# Allegro board EX1.brd
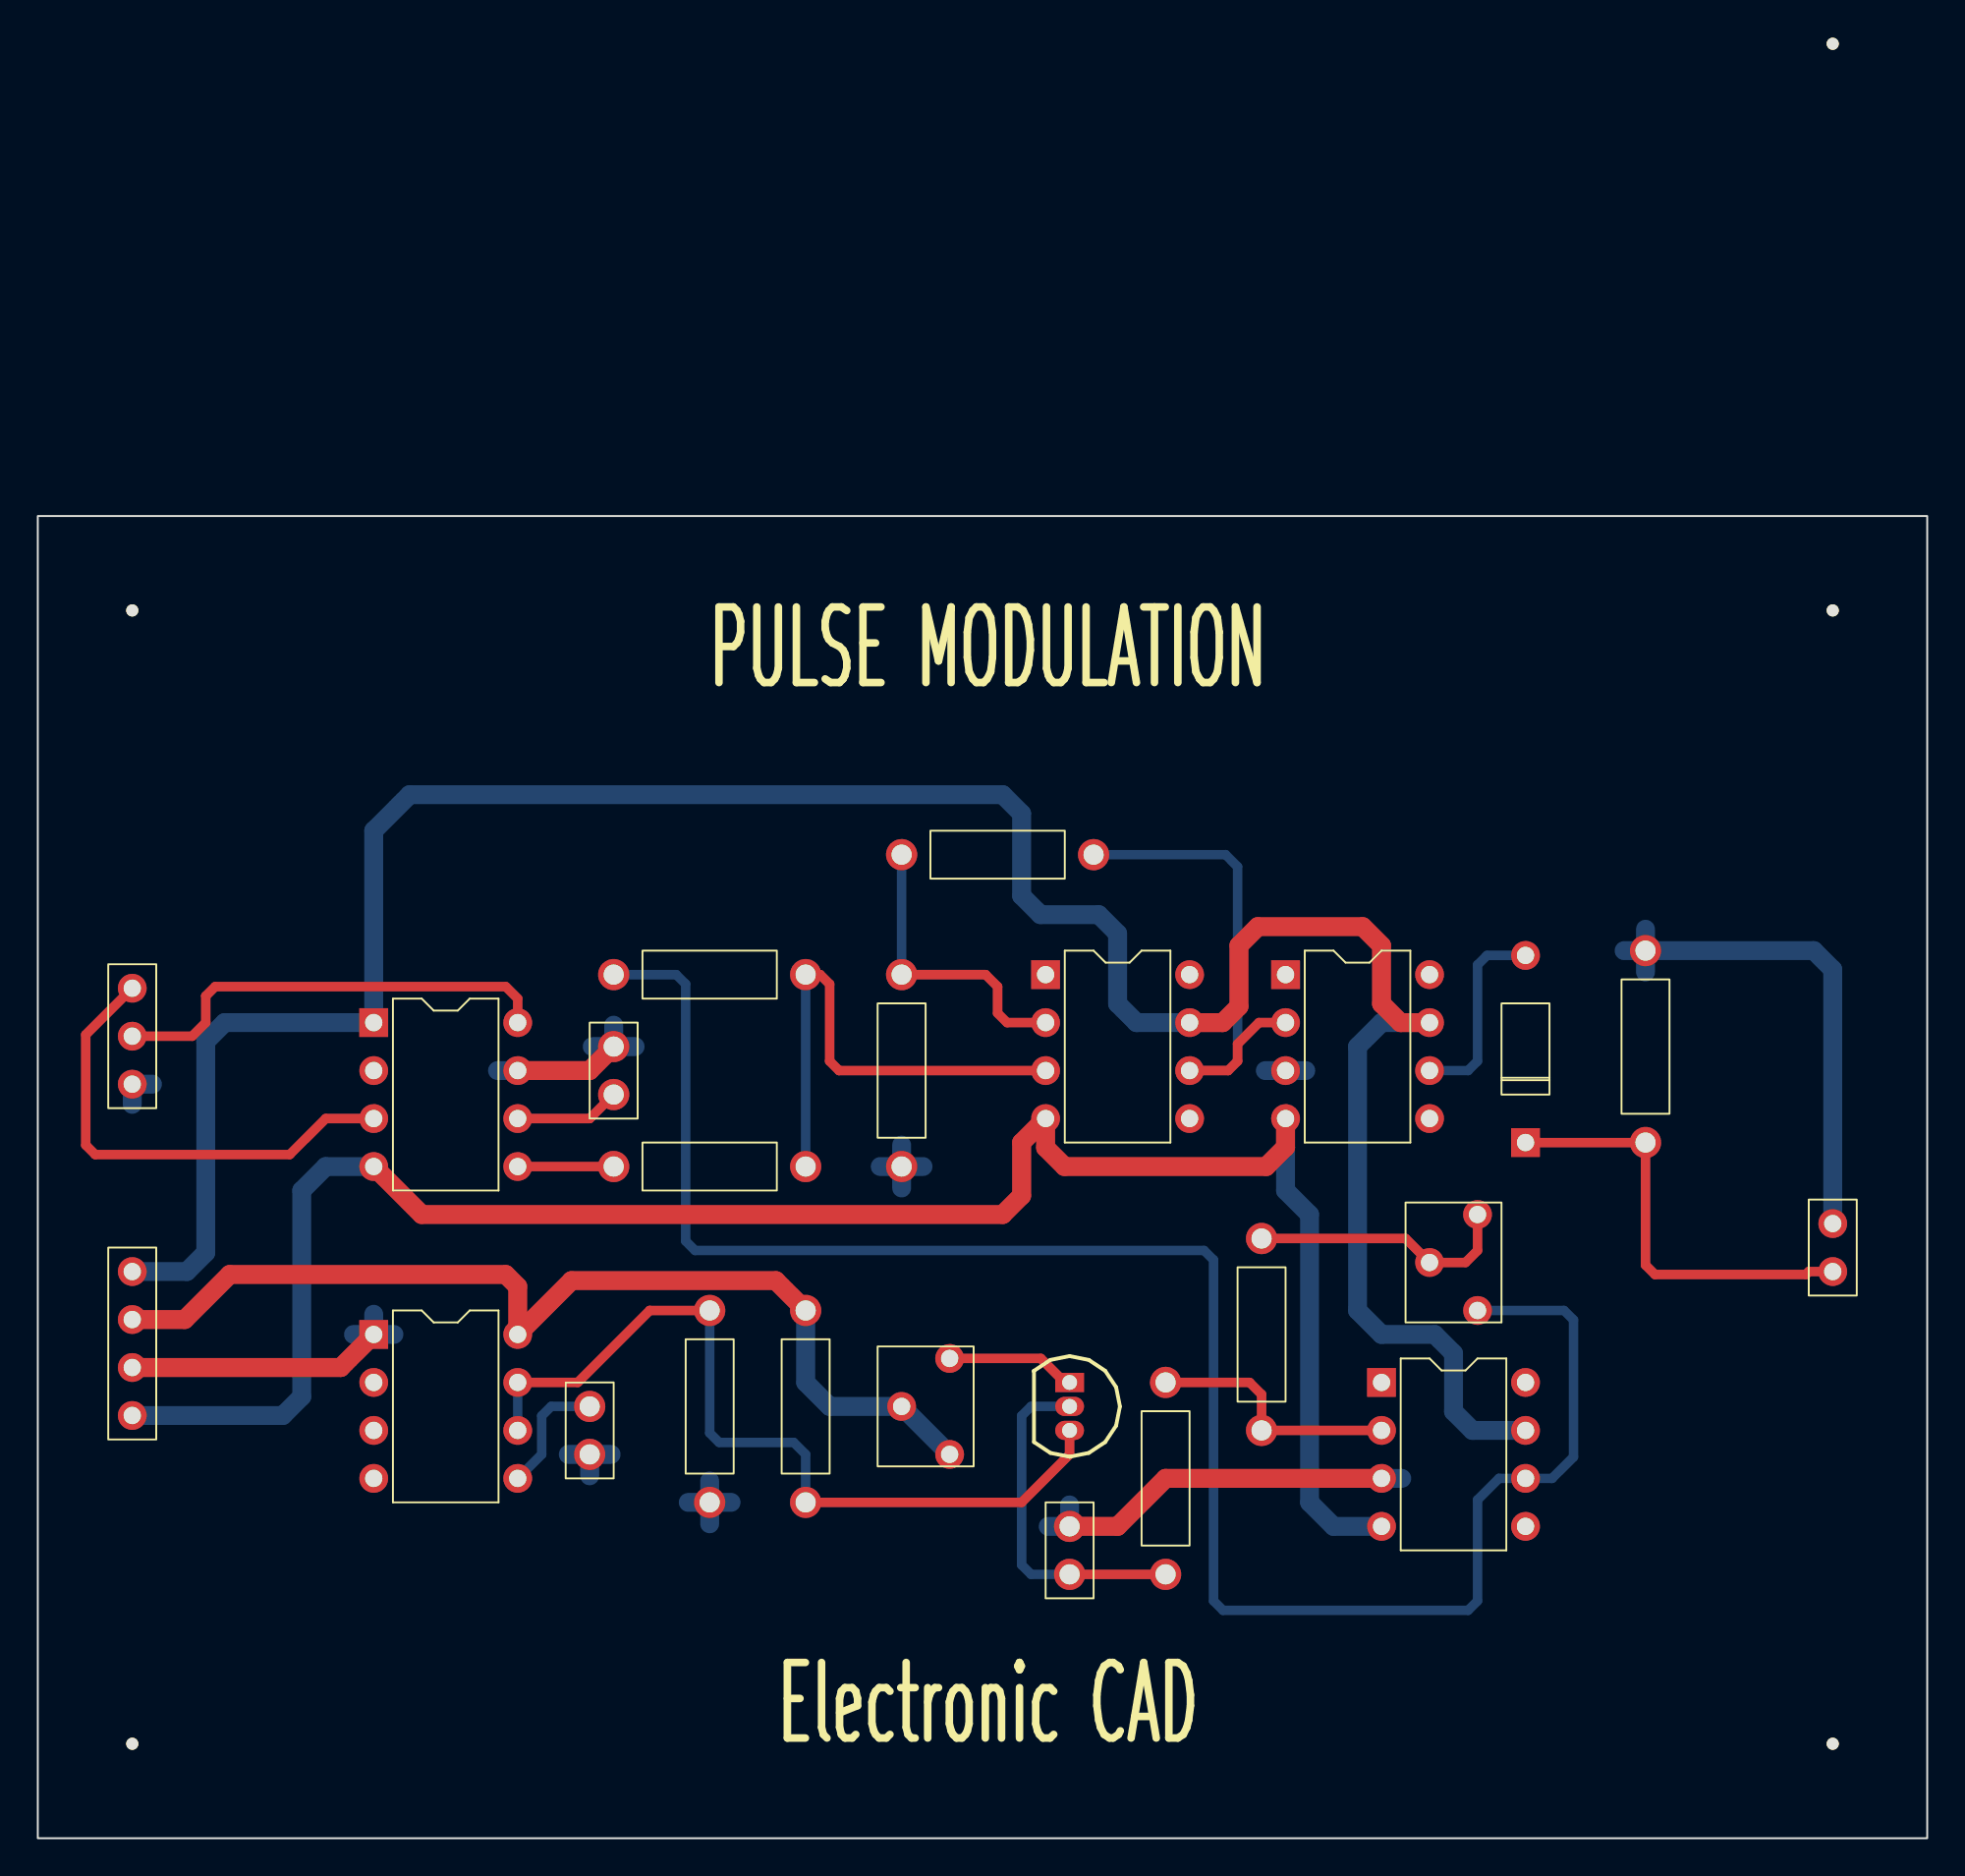
[diagram p0: board, top side]
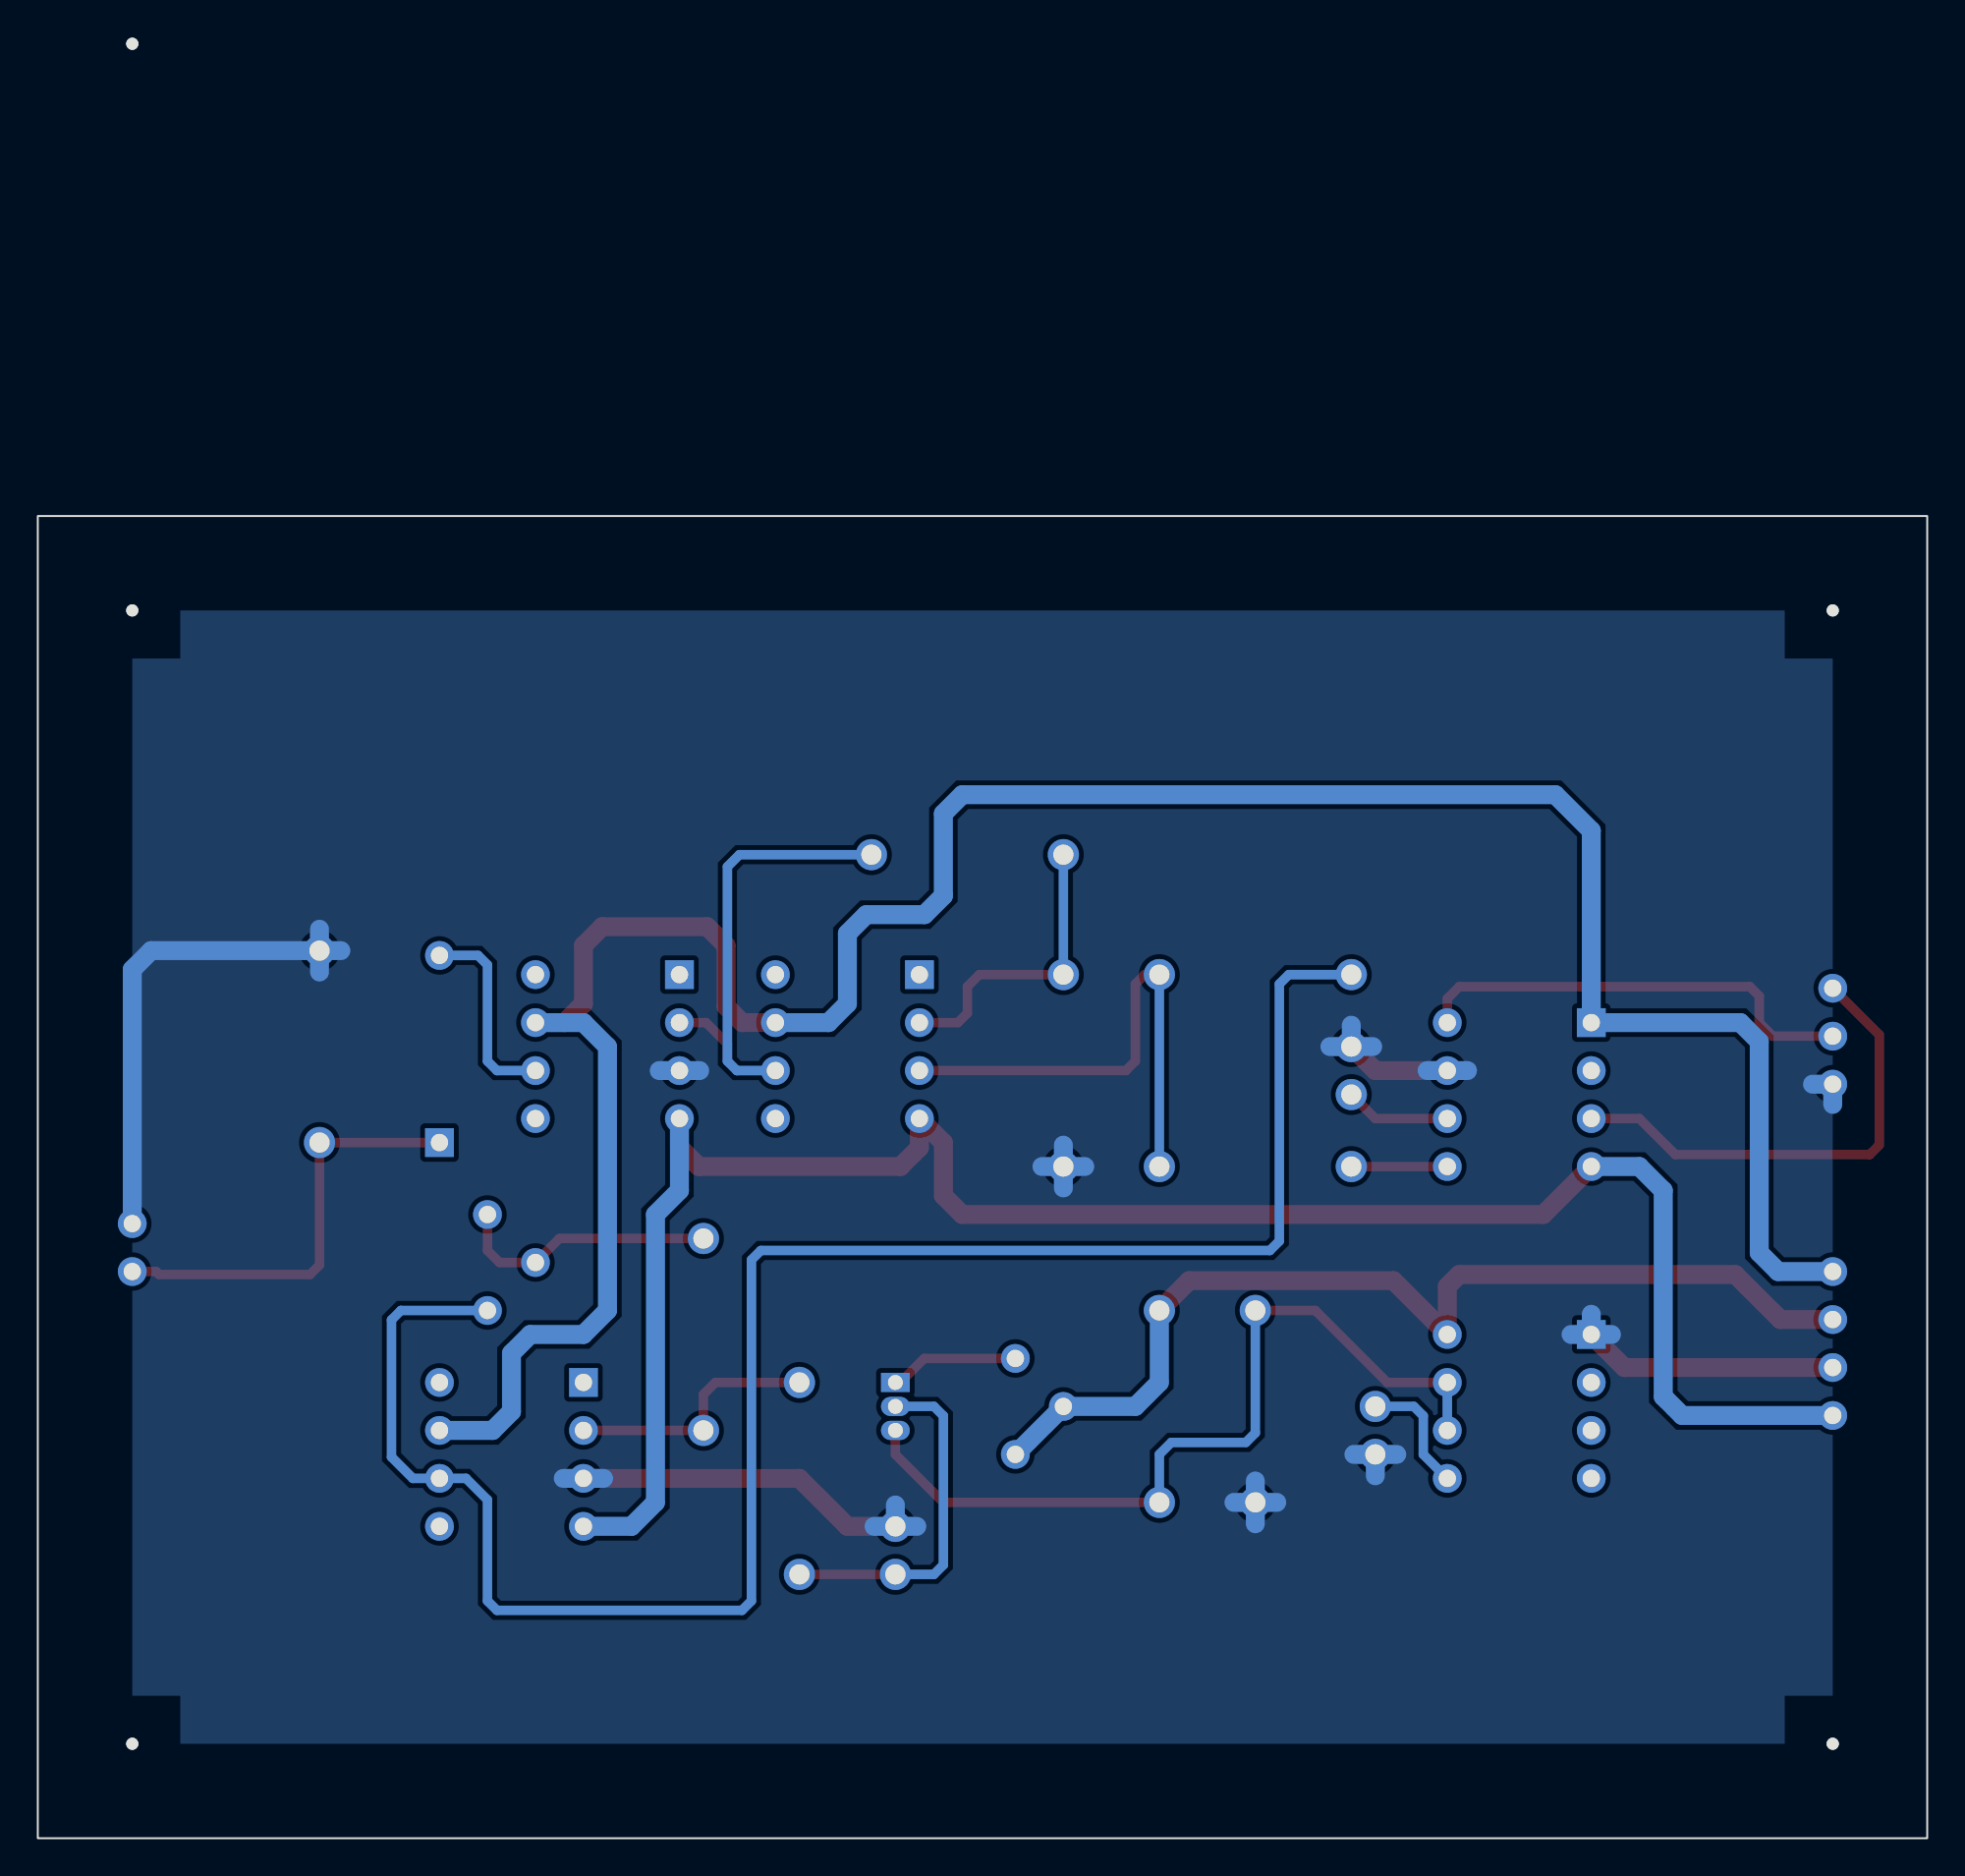
[diagram p1: board, bottom side, seen from below]

Outline 100 x 70 mm; copper layers: TOP, BOTTOM. Coordinates in mm from the lower left corner of the outline.
Outline path: rectangle 0,0 100,70

## Design rules (mm)
constraint set DEFAULT: min track width 0.5
nets with their own width: min track width 1; nets +5V +15V -15V GND

## Placement (name value [footprint] x y rotation side)
C1  0.01uF  [CAPCK05]  54.61 13.97 0 top
C2  0.01uF  [CAPCK05]  29.21 22.86 180 top
C3  0.01uF  [CAPCK05]  30.48 39.37 0 top
D1  1S1588  [DO41]  78.74 36.83 0 top
J1  CON4  [JUMPER4]  5 30 270 top
J2  CON3  [JUMPER3]  5 45 270 top
J3  CON2  [JUMPER2]  95 30 90 top
NOREF  -  []  95 5 90 top
NOREF#2  -  []  0 0 90 top
NOREF#3  -  [unnamed#2]  95 5 0 top
NOREF#4  -  []  5 30 90 top
NOREF#5  -  [unnamed#2]  95 95 0 top
NOREF#6  -  []  100 0 90 top
NOREF#7  -  []  0 65.02 0 top
NOREF#8  -  [unnamed#2]  95 65 0 top
NOREF#9  -  []  5 5 90 top
NOREF#10  -  []  95 65 0 top
NOREF#11  -  []  0 0 90 top
NOREF#12  -  []  5 45 90 top
NOREF#13  -  []  5 65 90 top
NOREF#14  -  [unnamed#2]  5 65 0 top
NOREF#15  -  []  0 70 0 top
NOREF#16  -  [unnamed#2]  5 5 0 top
NOREF#17  -  []  5 65 0 top
Q1  2SA1015  [TO92]  54.61 24.13 270 top
R1  560  [RES400]  64.77 21.59 0 top
R2  39k  [RES400]  40.64 27.94 180 top
R3  6.2k  [RES400]  59.69 13.97 0 top
R4  100k  [RES400]  35.56 27.94 180 top
R5  10k  [RES400]  30.48 45.72 270 top
R6  10k  [RES400]  55.88 52.07 90 top
R7  10k  [RES400]  30.48 35.56 270 top
R8  10k  [RES400]  45.72 35.56 0 top
R9  10k  [RES400]  85.09 46.99 180 top
U1  NE555  [DIP8_3]  17.78 26.67 0 top
U2  LF356  [DIP8_3]  71.12 24.13 0 top
U3  LF398  [DIP8_3]  17.78 43.18 0 top
U4  LF356  [DIP8_3]  53.34 45.72 0 top
U5  LF356  [DIP8_3]  66.04 45.72 0 top
VR1  5k  [RESADJ]  48.26 25.4 0 top
VR2  20k  [RESADJ]  76.2 33.02 0 top

## Library data of the parts
C1-C3 = CAP NP: Tolerance: ***; User Part Number: ***
D1 = DIODE
J1 = CON4: User Part Number: ***
J2 = CON3: User Part Number: ***
J3 = CON2: User Part Number: ***
Q1 = 2SA1020
R1-R9 = R: Tolerance: ***; User Part Number: ***
U1 = NE555_1: Tolerance: ***; User Part Number: ***
U2 U4 U5 = LF356_3: Tolerance: ***; User Part Number: ***
U3 = LF111_2: Tolerance: ***; User Part Number: ***
VR1 VR2 = POT: Tolerance: ***; User Part Number: ***

## Footprints (pads in the part's own frame, mm; a bottom-side part is the same pattern mirrored in y, then rotated)
CAPCK05
  round 1.651 hole 1.067: 1(0,0) 2(0,2.54)
DIP8_3
  rect 1.524x1.524 hole 0.914: 1(0,0)
  round 1.524 hole 0.914: 2(0,-2.54) 3(0,-5.08) 4(0,-7.62) 5(7.62,-7.62) 6(7.62,-5.08) 7(7.62,-2.54) 8(7.62,0)
DO41
  rect 1.524x1.524 hole 0.914: 1(0,0)
  round 1.524 hole 0.914: 2(0,9.906)
JUMPER2
  round 1.524 hole 0.914: 1(0,0) 2(2.54,0)
JUMPER3
  round 1.524 hole 0.914: 1(0,0) 2(2.54,0) 3(5.08,0)
JUMPER4
  round 1.524 hole 0.914: 1(0,0) 2(2.54,0) 3(5.08,0) 4(7.62,0)
RES400
  round 1.651 hole 1.067: 1(0,0) 2(0,10.16)
RESADJ
  round 1.524 hole 0.914: 1(0,0) 2(-2.54,-2.54) 3(0,-5.08)
TO92
  rect 1.016x1.524 hole 0.787: 1(0,0)
  oval 1.016x1.524 hole 0.787: 2(1.27,0) 3(2.54,0)
unnamed#2
  round 0.635 hole 3.175 unplated: (0,0)

## Nets
+5V: J1.2 R2.1 U1.8(VCC) VR1.2(WIPER) VR1.3
+15V: J1.1 U2.7 U3.1 U4.7 U5.7
-15V: J1.4 U2.4(V-) U3.4(V-) U4.4(V-) U5.4(V-)
GND: C1.2 C2.2 C3.2 J1.3 J2.3 J3.2 R4.2 R8.1 R9.1 U1.1 U2.3 U3.7 U5.3
CLOCK: U1.2
SIG_1: R5.1 U2.6 VR2.3
N00993: C2.1 U1.5
N01022: Q1.3 R2.2 R4.1 U1.6 U1.7
N01206: C1.1 Q1.2 R3.1
N01662: Q1.1(E) VR1.1
N01714: R1.1 R3.2 U2.2
N01935: R1.2 VR2.1 VR2.2(WIPER)
N02456: J2.2 U3.8
N02500: J2.1 U3.3
N02821: C3.1 U3.6
N02903: R7.1 U3.5
N02911: R5.2 R7.2 U4.3
N03044: R6.2 R8.2 U4.2
N03249: R6.1 U4.6 U5.2
N04641: D1.2 U5.6
N04671: D1.1(K) J3.1 R9.2

Pads without a net: U1 3 4; U2 1 5 8; U3 2; U4 1 5 8; U5 1 5 8

## Routing (per net, layer and track width the routed paths; a pad name or vN(x,y) marks a point on that pad's centre or on a via; arc(x,y) is an arc through that point)
+5V: length 54.3
  TOP w1: R2.1 39.06,29.52 28.25,29.52 U1.8 25.4,29.21 24.77,29.84 10.16,29.84 7.78,27.46 J1.2
  BOTTOM w1: R2.1 40.64,24.13 41.91,22.86 VR1.2 VR1.3
+15V: length 140.9
  TOP w1: U4.7 62.71,43.18 63.57,44.04 63.57,47.26 64.57,48.26 70.12,48.26 71.12,47.26 71.12,44.18 72.12,43.18 U5.7
  BOTTOM w1: U4.7 58.15,43.18 57.15,44.18 57.15,47.9 56.15,48.9 53.07,48.9 52.07,49.9 52.07,54.24 51.07,55.24 19.68,55.24 17.78,53.34 U3.1 9.89,43.18 8.89,42.18 8.89,31 7.89,30 J1.1 ; U2.7 75.93,21.59 74.93,22.59 74.93,25.67 73.93,26.67 71.12,26.67 69.85,27.94 69.85,41.91 71.12,43.18 U5.7
-15V: length 106.8
  TOP w1: U5.4 66.04,36.58 65.02,35.56 54.34,35.56 53.34,36.56 U4.4 52.07,36.83 52.07,34.02 51.07,33.02 20.32,33.02 U3.4
  BOTTOM w1: J1.4 12.97,22.38 13.97,23.38 13.97,34.29 15.24,35.56 U3.4 ; U2.4 68.58,16.51 67.31,17.78 67.31,33.02 66.04,34.29 U5.4
GND: length 94.9
  TOP w1: C3.2 29.21,40.64 U3.7 ; C1.2 57.15,16.51 59.69,19.05 U2.3 ; J1.3 16.03,24.92 U1.1
  BOTTOM w1: 5,38.85 J2.3 6.07,39.92 ; 29.35,41.91 C3.2 ; C3.2 31.61,41.91 ; C3.2 30.48,43.04 ; R8.1 45.72,36.69 ; R8.1 46.85,35.56 ; R8.1 45.72,34.43 ; R8.1 44.59,35.56 ; R4.2 36.69,17.78 ; R4.2 35.56,18.91 ; R4.2 35.56,16.65 ; R4.2 34.43,17.78 ; 53.48,16.51 C1.2 ; C1.2 54.61,17.64 ; C1.2 55.74,16.51 ; R9.1 85.09,48.12 ; R9.1 83.96,46.99 ; R9.1 94,46.99 95,45.99 J3.2 ; R9.1 85.09,45.86 ; 28.08,20.32 C2.2 ; C2.2 29.21,19.19 ; C2.2 30.34,20.32 ; 72.19,19.05 U2.3 70.05,19.05 ; 16.71,26.67 U1.1 ; U1.1 17.78,27.74 ; U1.1 18.85,26.67 ; 26.47,40.64 U3.7 24.33,40.64 ; 67.11,40.64 U5.3 64.97,40.64
SIG_1: length 102.3
  BOTTOM w0.5: VR2.3 80.78,27.94 81.28,27.44 81.28,20.18 80.14,19.05 U2.6 77.33,19.05 76.2,17.91 76.2,12.56 75.7,12.06 62.73,12.06 62.23,12.56 62.23,30.61 61.73,31.11 34.79,31.11 34.29,31.61 34.29,45.22 33.79,45.72 R5.1
N00993: length 6.6
  BOTTOM w0.5: C2.1 27.17,22.86 26.67,22.36 26.67,20.32 U1.5
N01022: length 45.1
  TOP w0.5: R4.1 32.39,27.94 28.58,24.13 U1.7 ; R2.2 52.07,17.78 54.61,20.32 Q1.3
  BOTTOM w0.5: U1.7 U1.6 ; R4.1 35.56,21.45 36.06,20.95 40.01,20.95 40.64,20.32 R2.2
N01206: length 18.5
  TOP w0.5: C1.1 R3.1
  BOTTOM w0.5: Q1.2 52.57,22.86 52.07,22.36 52.07,14.47 52.57,13.97 C1.1
N01662: length 6.9
  TOP w0.5: VR1.1 53.09,25.4 54.36,24.13 Q1.1
N01714: length 13.6
  TOP w0.5: U2.2 R1.1 64.77,23.5 64.14,24.13 R3.2
N01935: length 14.1
  TOP w0.5: R1.2 72.39,31.75 VR2.2 75.56,30.48 76.2,31.11 VR2.1
N02456: length 23.8
  TOP w0.5: U3.8 25.4,44.45 24.77,45.09 9.39,45.09 8.89,44.59 8.89,43.18 8.17,42.46 J2.2
N02500: length 25.6
  TOP w0.5: U3.3 15.24,38.1 13.33,36.2 3.04,36.2 2.54,36.7 2.54,42.54 J2.1
N02821: length 5.6
  TOP w0.5: C3.1 29.21,38.1 U3.6
N02903: length 5.1
  TOP w0.5: U3.5 R7.1
N02911: length 27.4
  TOP w0.5: R5.2 41.41,45.72 41.91,45.22 41.91,41.14 42.41,40.64 U4.3
  BOTTOM w0.5: R5.2 R7.2
N03044: length 15.8
  TOP w0.5: U4.2 51.3,43.18 50.8,43.68 50.8,45.09 50.16,45.72 R8.2
  BOTTOM w0.5: R6.2 R8.2
N03249: length 27.6
  TOP w0.5: U4.6 63,40.64 63.5,41.14 63.5,42.05 64.64,43.18 U5.2
  BOTTOM w0.5: U4.6 63,40.64 63.5,41.14 63.5,51.43 62.86,52.07 R6.1
N04641: length 10.6
  BOTTOM w0.5: U5.6 75.7,40.64 76.2,41.14 76.2,46.23 76.7,46.74 D1.2
N04671: length 23
  TOP w0.5: D1.1 R9.2 85.09,30.34 85.59,29.84 93.58,29.84 93.73,30 J3.1

## Copper pours and planes (outline as drawn; the poured copper is in the pictures)
GND on BOTTOM: 5,5 5,65 95,65 95,5

## Text on the board
Ref Des/Silkscreen Top: PULSE MODULATION | Electronic CAD
COMPVAL_TYPE_TOP: FIGURE | FINISHED_SIZE | 0.787 | 0.914 | 1.067 | 3.175 | DRILL CHART: TOP to BOTTOM | ALL UNITS ARE IN MILLIMETERS | PLATED | NON-PLATED | QTY | 3 | 57 | 24 | 5
